# Altium PCB Temctrl.PcbDoc (part 1 of 2)
Units mm, origin at the board's own origin, x right, y up, seen from the top; angles counter-clockwise.
Board outline 209.42 x 71.25 mm, 2 copper layers (Top Layer, Bottom Layer); 243 components, 190 nets, 729 pads, 123 vias.
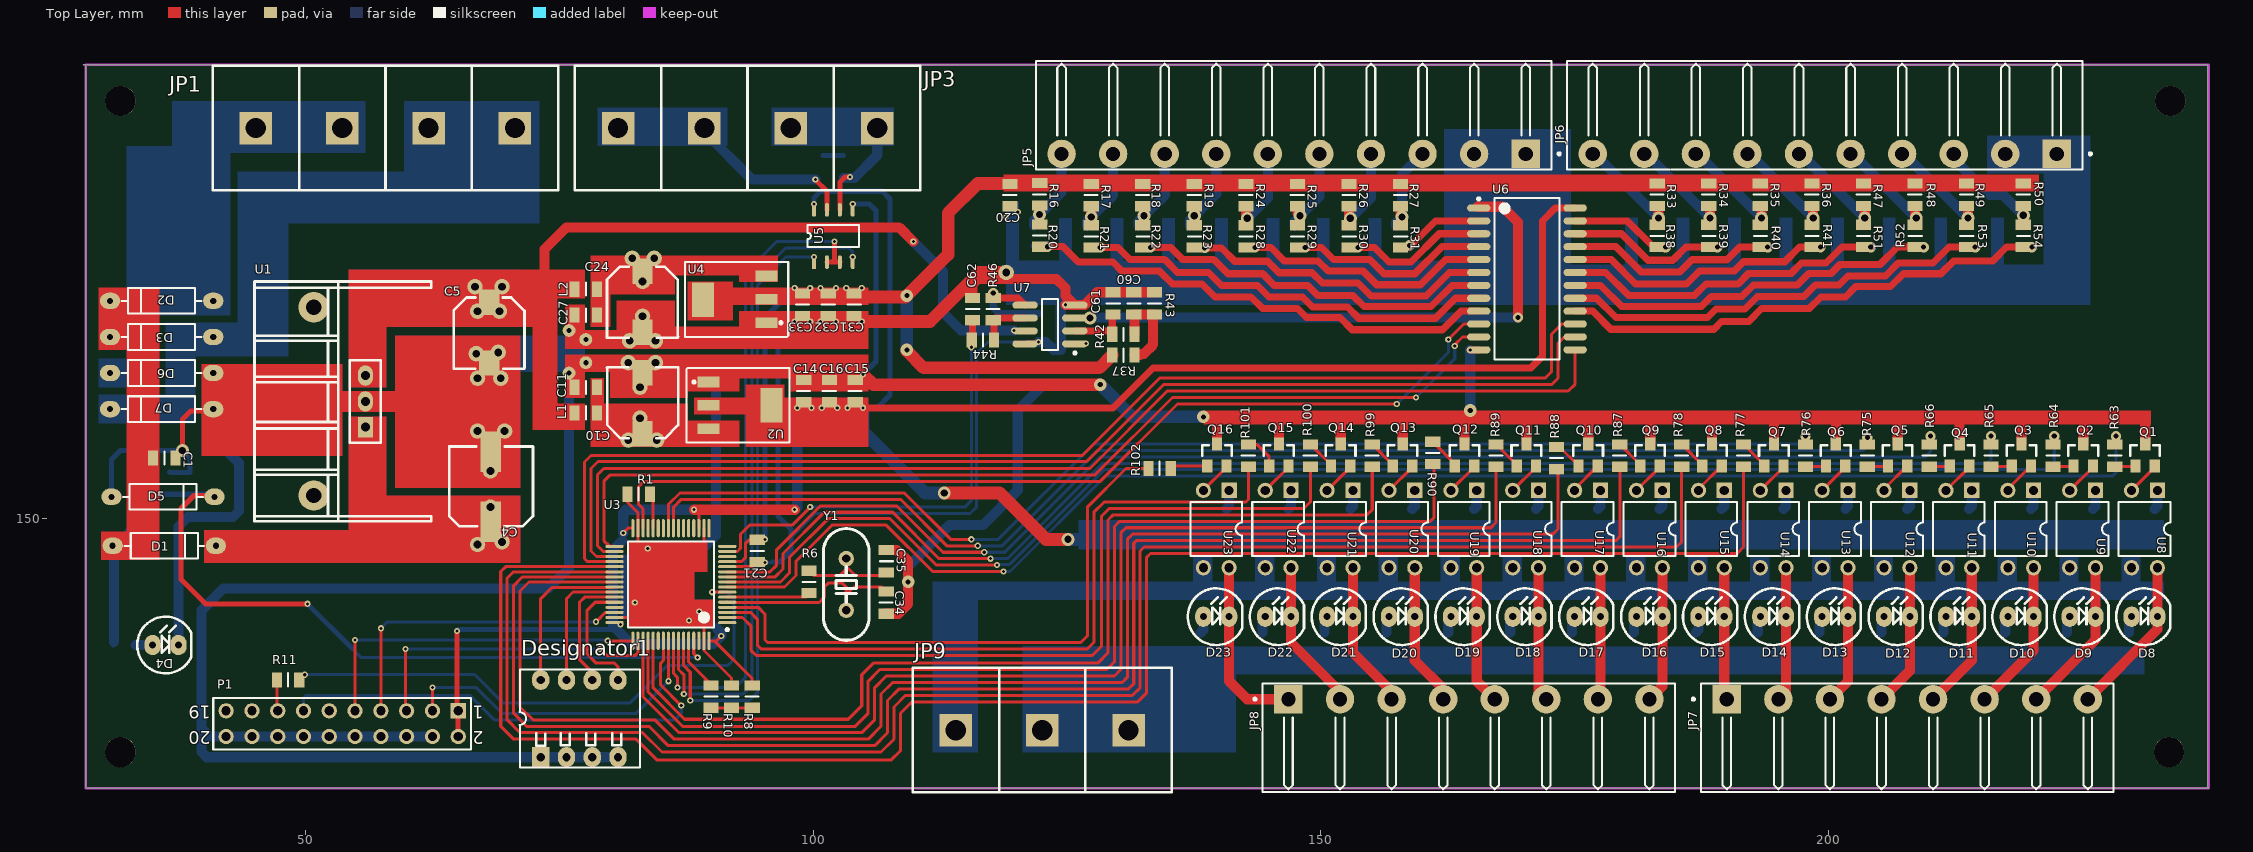
[diagram p0: Top Layer view]
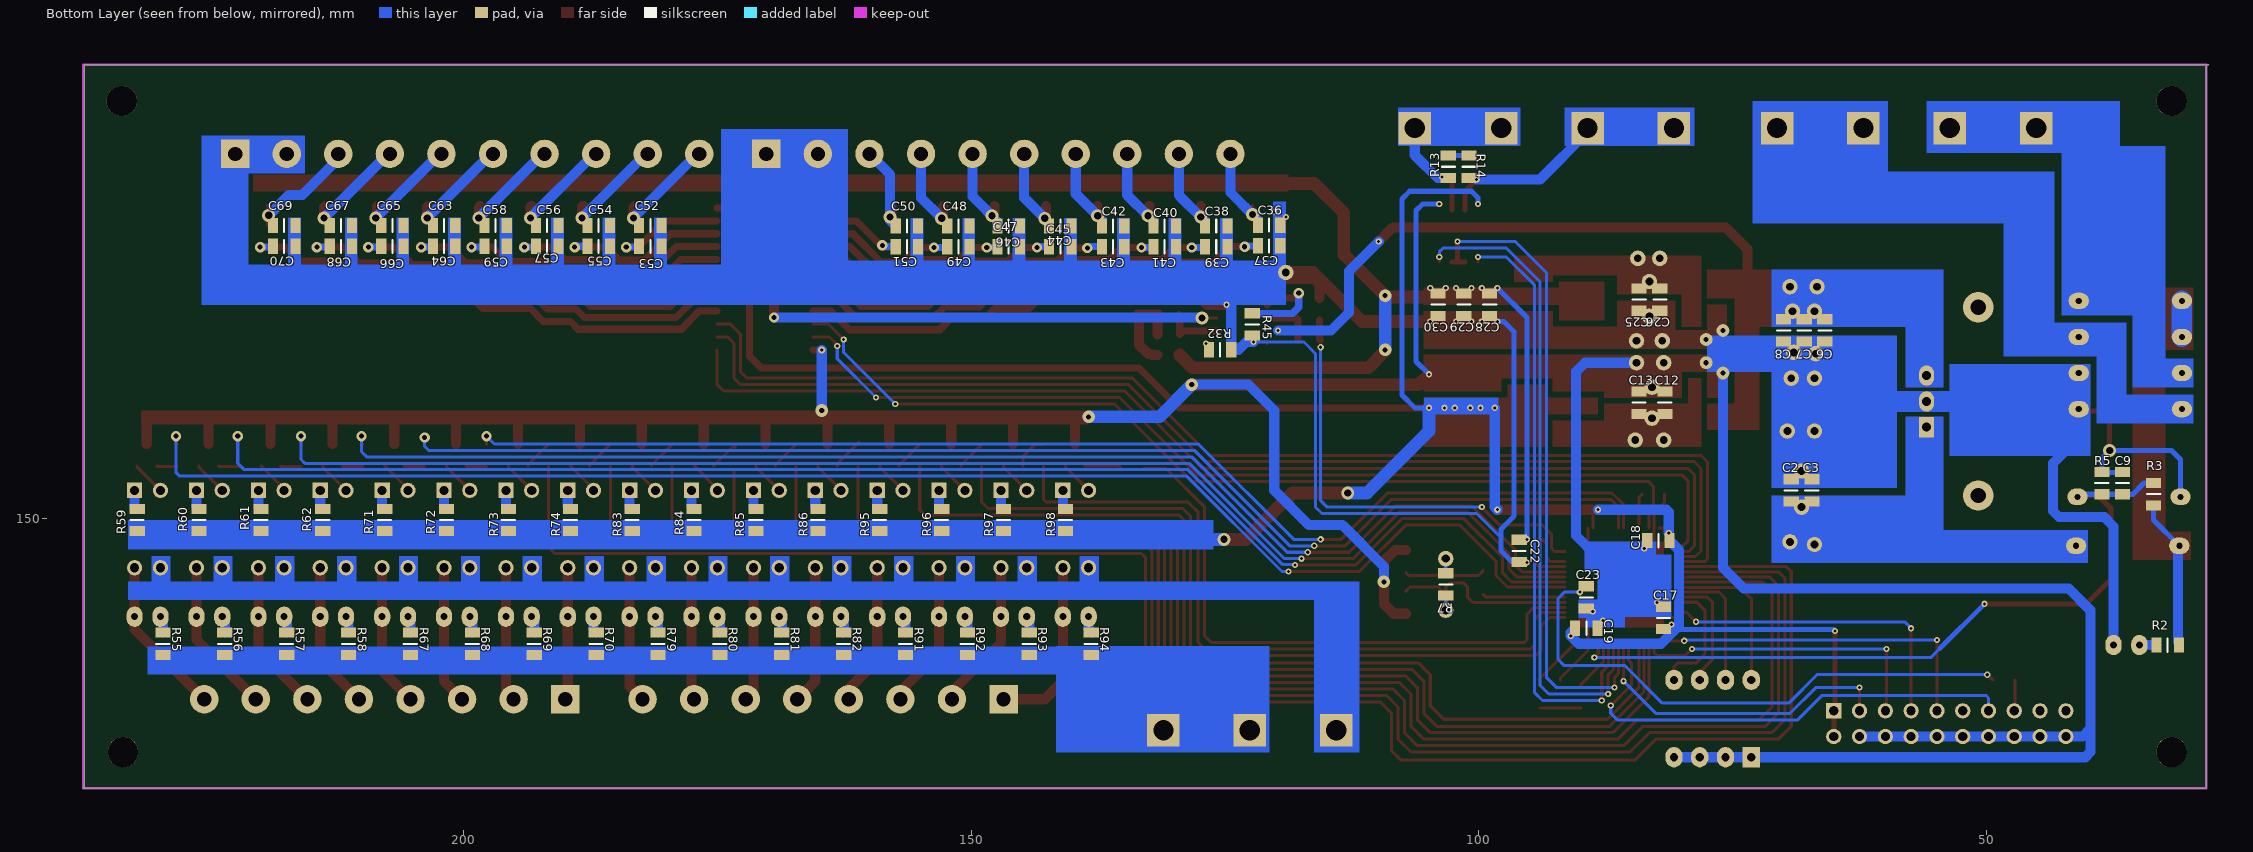
[diagram p1: Bottom Layer view, seen from below]

## Layer stack, top to bottom
Top Layer: signal copper 0.0356
Dielectric: dielectric 0.32, FR-4, Dk 4.8
Bottom Layer: signal copper 0.0356

## Board outline
28.321,194.691 28.321,123.444 237.49,123.444 237.363,123.571 237.363,194.691 28.067,194.691 28.321,194.691

## Design rules (kind name [scope] priority, off if disabled: settings)
Clearance [All] p1: gap=0.152
HoleSize [All] p1: absolutevalues=TRUE maxlimit=25.4 minlimit=0.025 maxpercent=80.000 minpercent=20.000
HoleToHoleClearance [All] p1: gap=0 allowstackedmicrovias=TRUE
MinimumSolderMaskSliver [All] p1: minsoldermaskwidth=0
PolygonConnect [All] p1: connectstyle=Relief reliefconductorwidth=0.254 reliefentries=4 polygonreliefangle="90 Angle"
RoutingVias [All] p1: holewidth=0.508 width=1.016 viastyle="Through Hole" minholewidth=0.305 minwidth=0.61 maxholewidth=3.81 maxwidth=5.08
SilkToSilkClearance [All] p1: silktosilkclearance=0
SilkscreenOverComponentPads [All] p1: minsilkscreentomaskgap=0
SolderMaskExpansion [All] p1: expansion=0.102
TestPointUsage [All] p1: valid=0 allowmultiple=FALSE
Testpoint [All] p1: side=15 testpointundercomponent=TRUE minsize=1.016 maxsize=2.54 preferedsize=1.524 minholesize=0 maxholesize=1.016 preferedholesize=0.813 testpointgrid=0.025 style=1023 order=0123456789
Width [All] p1: maxlimit=25.4 minlimit=0.254 preferedwidth=1.016
19 further rules are at their usual default settings.

## Classes and differential pairs
component class Temctrl_CPU: C1 C2 C3 C4 C5 C6 C7 C8 C9 C10 C11 C12 C13 C14 C15 C16 C17 C18 C19 C20 C21 C22 C23 C24 C25 C26 C27 C28 C29 C30 C31 C32 C33 C34 C35 D1 D2 D3 D4 D5 D6 D7 JP1 JP3 L1 L2 P1 R1 R2 R3 R5 R6 R7 R8 R9 R10 R11 R13 R14 U1 U2 U3 U4 U5 Y1
component class Temctrl_I: C36 C37 C38 C39 C40 C41 C42 C43 C44 C45 C46 C47 C48 C49 C50 C51 C52 C53 C54 C55 C56 C57 C58 C59 C60 C61 C62 C63 C64 C65 C66 C67 C68 C69 C70 JP5 JP6 R16 R17 R18 R19 R20 R21 R22 R23 R24 R25 R26 R27 R28 R29 R30 R31 R32 R33 R34 R35 R36 R37 R38 R39 R40 R41 R42 R43 R44 R45 R46 R47 R48 R49 R50 R51 R52 R53 R54 U6 U7
component class Temctrl_O: D8 D9 D10 D11 D12 D13 D14 D15 D16 D17 D18 D19 D20 D21 D22 D23 JP7 JP8 JP9 Q1 Q2 Q3 Q4 Q5 Q6 Q7 Q8 Q9 Q10 Q11 Q12 Q13 Q14 Q15 Q16 R55 R56 R57 R58 R59 R60 R61 R62 R63 R64 R65 R66 R67 R68 R69 R70 R71 R72 R73 R74 R75 R76 R77 R78 R79 R80 R81 R82 R83 R84 R85 R86 R87 R88 R89 R90 R91 R92 R93 R94 R95 R96 R97 R98 R99 R100 R101 R102 U8 U9 U10 U11 U12 U13 U14 U15 U16 U17 U18 U19 U20 U21 U22 U23

## Components (designator, comment, footprint, x,y, rotation, side; value= is the part's Value field where it differs from the comment)
C1 "106" 0805 36.068,155.956 r0 top
C2 "104" 0805 69.215,152.781 r90 bottom
C3 "104" 0805 67.183,152.781 r90 bottom
C4 "50V/100uF" "50V/100uF SOC" 68.199,149.733 r90 top
C5 "16V/100uF" "100/16V   SOC" 68.072,171.323 r270 top
C6 "104" 0805 65.913,168.529 r270 bottom
C7 "104" 0805 67.945,168.529 r270 bottom
C8 "104" 0805 69.977,168.529 r270 bottom
C9 "104" 0805 36.576,153.5 r90 bottom
C10 "100uF/16V" "100/16V   SOC" 83.185,158.369 r90 top
C11 "104" 0805 77.597,162.941 r180 top
C12 "104" 0805 81.661,161.417 r90 bottom
C13 "104" 0805 84.201,161.417 r90 bottom
C14 "106" 0805 99.06,162.56 r90 top
C15 "106" 0805 104.14,162.56 r90 top
C16 "104" 0805 101.6,162.56 r90 top
C17 "104" 0805 81.788,140.208 r90 bottom
C18 "104" 0805 82.296,147.828 r0 bottom
C19 "104" 0805 89.408,139.192 r180 bottom
C20 "104" 0805 119.38,181.864 r90 top
C21 "104" 0805 94.488,146.812 r90 top
C22 "106" 0805 96.012,146.812 r90 bottom
C23 "104" 0805 89.408,142.24 r270 bottom
C24 "100uF/16V" "100/16V   SOC" 83.185,174.371 r270 top
C25 "104" 0805 84.201,171.577 r270 bottom
C26 "104" 0805 82.169,171.577 r270 bottom
C27 "104" 0805 77.597,170.053 r180 top
C28 "106" 0805 98.933,171.069 r270 bottom
C29 "106" 0805 101.473,171.069 r270 bottom
C30 "104" 0805 104.013,171.069 r270 bottom
C31 "104" 0805 104.013,171.069 r270 top
C32 "104" 0805 101.473,171.069 r270 top
C33 "104" 0805 98.933,171.069 r270 top
C34 "20P" 0805 107.188,141.732 r90 top
C35 "20P" 0805 107.188,145.796 r270 top
C36 "104" 0805 120.65,178.9 r180 bottom
C37 "102" 0805 120.65,176.868 r0 bottom
C38 "104" 0805 125.857,178.816 r180 bottom
C39 "102" 0805 125.857,176.784 r0 bottom
C40 "104" 0805 130.937,178.816 r180 bottom
C41 "102" 0805 130.937,176.784 r0 bottom
C42 "104" 0805 136.017,178.816 r180 bottom
C43 "102" 0805 136.017,176.784 r0 bottom
C44 "104" 0805 141.224,178.816 r180 bottom
C45 "102" 0805 141.224,176.784 r0 bottom
C46 "104" 0805 146.304,178.816 r180 bottom
C47 "102" 0805 146.304,176.784 r0 bottom
C48 "104" 0805 151.257,178.816 r180 bottom
C49 "102" 0805 151.257,176.784 r0 bottom
C50 "104" 0805 156.337,178.816 r180 bottom
C51 "102" 0805 156.337,176.784 r0 bottom
C52 "104" 0805 181.61,178.859 r180 bottom
C53 "102" 0805 181.61,176.827 r0 bottom
C54 "104" 0805 186.69,178.859 r180 bottom
C55 "102" 0805 186.69,176.827 r0 bottom
C56 "104" 0805 191.77,178.859 r180 bottom
C57 "102" 0805 191.77,176.827 r0 bottom
C58 "104" 0805 196.85,178.859 r180 bottom
C59 "102" 0805 196.85,176.827 r0 bottom
C60 "104" 0805 131.572,171.196 r270 top
C61 "102" 0805 129.54,171.196 r270 top
C62 "102" 0805 115.697,170.645 r270 top
C63 "104" 0805 201.93,178.859 r180 bottom
C64 "102" 0805 201.93,176.827 r0 bottom
C65 "104" 0805 207.01,178.859 r180 bottom
C66 "102" 0805 207.01,176.827 r0 bottom
C67 "104" 0805 212.09,178.859 r180 bottom
C68 "102" 0805 212.09,176.827 r0 bottom
C69 "104" 0805 217.678,178.859 r180 bottom
C70 "102" 0805 217.678,176.827 r0 bottom
D1 "4007" DIODE0.4 36.068,147.32 r0 top
D2 "4007" DIODE0.4 35.814,171.45 r180 top
D3 "4007" DIODE0.4 35.814,167.894 r180 top
D4 "LED0" LED0.1-0.22 36.195,137.541 r0 top
D5 "1N5333B" DIODE0.4 35.941,152.146 r0 top
D6 "4007" DIODE0.4 35.814,164.338 r180 top
D7 "4007" DIODE0.4 35.814,160.782 r180 top
D8 "LED0" LED0.1-0.22 231.14,140.335 r0 top
D9 "LED0" LED0.1-0.22 225.044,140.335 r0 top
D10 "LED0" LED0.1-0.22 218.948,140.335 r0 top
D11 "LED0" LED0.1-0.22 212.852,140.335 r0 top
D12 "LED0" LED0.1-0.22 206.756,140.335 r0 top
D13 "LED0" LED0.1-0.22 200.66,140.335 r0 top
D14 "LED0" LED0.1-0.22 194.564,140.335 r0 top
D15 "LED0" LED0.1-0.22 188.468,140.335 r0 top
D16 "LED0" LED0.1-0.22 182.372,140.335 r0 top
D17 "LED0" LED0.1-0.22 176.276,140.335 r0 top
D18 "LED0" LED0.1-0.22 170.18,140.335 r0 top
D19 "LED0" LED0.1-0.22 164.084,140.335 r0 top
D20 "LED0" LED0.1-0.22 157.988,140.335 r0 top
D21 "LED0" LED0.1-0.22 151.892,140.335 r0 top
D22 "LED0" LED0.1-0.22 145.796,140.335 r0 top
D23 "LED0" LED0.1-0.22 139.7,140.335 r0 top
Designator1 "Comment" SW-DIP-4 73.152,130.302 r0 top
JP1 "H-4" P4 70.612,188.468 r180 top
JP3 "H-4" P4 80.772,188.468 r0 top
JP5 "Header 10" "HEAD10B-H - X" 170.18,185.928 r270 top
JP6 "Header 10" "HEAD10B-H - X" 222.504,185.928 r270 top
JP7 "Header 8" "HEAD8B-H - X" 189.992,132.207 r90 top
JP8 "Header 8" "HEAD8B-H - X" 146.812,132.207 r90 top
JP9 "H-3" P3 131.064,129.159 r180 top
L1 "Inductor" 0805 77.597,160.401 r0 top
L2 "Inductor" 0805 77.597,172.593 r0 top
P1 "JTAG" HDR2X10 65.024,131.064 r180 top
Q1 "NPN" S9013SMD 230.251,155.194 r0 top
Q2 "NPN" S9013SMD 224.155,155.194 r0 top
Q3 "NPN" S9013SMD 218.059,155.194 r0 top
Q4 "NPN" S9013SMD 211.963,155.194 r0 top
Q5 "NPN" S9013SMD 205.867,155.194 r0 top
Q6 "NPN" S9013SMD 199.771,155.194 r0 top
Q7 "NPN" S9013SMD 193.675,155.194 r0 top
Q8 "NPN" S9013SMD 187.579,155.194 r0 top
Q9 "NPN" S9013SMD 181.483,155.194 r0 top
Q10 "NPN" S9013SMD 175.387,155.194 r0 top
Q11 "NPN" S9013SMD 169.291,155.194 r0 top
Q12 "NPN" S9013SMD 163.195,155.194 r0 top
Q13 "NPN" S9013SMD 157.099,155.194 r0 top
Q14 "NPN" S9013SMD 151.003,155.194 r0 top
Q15 "NPN" S9013SMD 144.907,155.194 r0 top
Q16 "NPN" S9013SMD 138.811,155.194 r0 top
R1 "10K" 0805 82.804,152.4 r0 top
R2 "10K" 0805 32.131,137.541 r0 bottom
R3 "100K" 0805 33.528,152.4 r270 bottom
R5 "20K" 0805 38.608,153.5 r90 bottom
R6 "390R" 0805 99.568,143.764 r270 top
R7 "1M" 0805 103.251,143.51 r270 bottom
R8 "NC" 0805 93.98,132.461 r90 top
R9 "10K" 0805 89.916,132.461 r270 top
R10 "10K" 0805 91.948,132.461 r270 top
R11 "0" 0805 48.26,134.112 r0 top
R13 "62" 0805 102.997,184.658 r270 bottom
R14 "62" 0805 100.965,184.658 r270 bottom
R16 "3K3 0.1%" 0805 122.301,181.948 r90 top
R17 "3K3 0.1%" 0805 127.381,181.864 r90 top
R18 "3K3 0.1%" 0805 132.461,181.864 r90 top
R19 "3K3 0.1%" 0805 137.541,181.864 r90 top
R20 "100K" 0805 122.301,177.884 r270 top
R21 "100K" 0805 127.381,177.8 r270 top
R22 "100K" 0805 132.461,177.8 r270 top
R23 "100K" 0805 137.541,177.8 r270 top
R24 "3K3 0.1%" 0805 142.621,181.864 r90 top
R25 "3K3 0.1%" 0805 147.701,181.864 r90 top
R26 "3K3 0.1%" 0805 152.781,181.864 r90 top
R27 "3K3 0.1%" 0805 157.861,181.864 r90 top
R28 "100K" 0805 142.621,177.8 r270 top
R29 "100K" 0805 147.701,177.8 r270 top
R30 "100K" 0805 152.781,177.8 r270 top
R31 "100K" 0805 157.861,177.8 r270 top
R32 "10K" 0805 125.476,166.624 r180 bottom
R33 "3K3 0.1%" 0805 183.134,181.907 r90 top
R34 "3K3 0.1%" 0805 188.214,181.907 r90 top
R35 "3K3 0.1%" 0805 193.294,181.907 r90 top
R36 "3K3 0.1%" 0805 198.374,181.907 r90 top
R37 "3K3 0.1%" 0805 130.556,166.116 r180 top
R38 "100K" 0805 183.134,177.843 r270 top
R39 "100K" 0805 188.214,177.843 r270 top
R40 "100K" 0805 193.294,177.843 r270 top
R41 "100K" 0805 198.374,177.843 r270 top
R42 "100K" 0805 130.556,168.148 r180 top
R43 "100 0.1%" 0805 133.604,171.196 r270 top
R44 "1K" 0805 116.713,167.597 r180 top
R45 "3K3 0.1%" 0805 122.301,169.121 r90 bottom
R46 "115K 0.1%" 0805 117.729,170.645 r90 top
R47 "3K3 0.1%" 0805 203.454,181.907 r90 top
R48 "3K3 0.1%" 0805 208.534,181.907 r90 top
R49 "3K3 0.1%" 0805 213.614,181.907 r90 top
R50 "3K3 0.1%" 0805 219.202,181.907 r90 top
R51 "100K" 0805 203.454,177.843 r270 top
R52 "100K" 0805 208.534,177.843 r270 top
R53 "100K" 0805 213.614,177.843 r270 top
R54 "100K" 0805 219.202,177.843 r270 top
R55 "10K" 0805 229.616,137.668 r90 bottom
R56 "10K" 0805 223.52,137.668 r90 bottom
R57 "10K" 0805 217.424,137.668 r90 bottom
R58 "10K" 0805 211.328,137.668 r90 bottom
R59 "470" 0805 232.156,149.86 r90 bottom
R60 "470" 0805 226.06,149.86 r90 bottom
R61 "470" 0805 219.964,149.86 r90 bottom
R62 "470" 0805 213.868,149.86 r90 bottom
R63 "3K3" 0805 228.219,156.21 r270 top
R64 "3K3" 0805 222.123,156.21 r270 top
R65 "3K3" 0805 216.027,156.21 r270 top
R66 "3K3" 0805 209.931,156.21 r270 top
R67 "10K" 0805 205.232,137.668 r90 bottom
R68 "10K" 0805 199.136,137.668 r90 bottom
R69 "10K" 0805 193.04,137.668 r90 bottom
R70 "10K" 0805 186.944,137.668 r90 bottom
R71 "470" 0805 207.772,149.86 r90 bottom
R72 "470" 0805 201.676,149.86 r90 bottom
R73 "470" 0805 195.58,149.86 r90 bottom
R74 "470" 0805 189.484,149.86 r90 bottom
R75 "3K3" 0805 203.835,156.21 r270 top
R76 "3K3" 0805 197.739,156.21 r270 top
R77 "3K3" 0805 191.643,156.21 r90 top
R78 "3K3" 0805 185.547,156.21 r90 top
R79 "10K" 0805 180.848,137.668 r90 bottom
R80 "10K" 0805 174.752,137.668 r90 bottom
R81 "10K" 0805 168.656,137.668 r90 bottom
R82 "10K" 0805 162.56,137.668 r90 bottom
R83 "470" 0805 183.388,149.86 r90 bottom
R84 "470" 0805 177.292,149.86 r90 bottom
R85 "470" 0805 171.196,149.86 r90 bottom
R86 "470" 0805 165.1,149.86 r90 bottom
R87 "3K3" 0805 179.451,156.21 r90 top
R88 "3K3" 0805 173.228,155.956 r90 top
R89 "3K3" 0805 167.259,156.21 r90 top
R90 "3K3" 0805 161.036,156.464 r90 top
R91 "10K" 0805 156.464,137.668 r90 bottom
R92 "10K" 0805 150.368,137.668 r90 bottom
R93 "10K" 0805 144.272,137.668 r90 bottom
R94 "10K" 0805 138.176,137.668 r90 bottom
R95 "470" 0805 159.004,149.86 r90 bottom
R96 "470" 0805 152.908,149.86 r90 bottom
R97 "470" 0805 146.812,149.86 r90 bottom
R98 "470" 0805 140.716,149.86 r90 bottom
R99 "3K3" 0805 155.067,156.21 r90 top
R100 "3K3" 0805 148.971,156.21 r90 top
R101 "3K3" 0805 142.875,156.21 r90 top
R102 "3K3" 0805 134.112,154.94 r0 top
U1 "7805" "SIP-W3 /SRQ25" 55.88,161.544 r90 top
U2 "LM1117" DSO-G3/P2.3 89.662,163.449 r270 top
U3 "STM32F103R8T6" LQFP64_N 85.979,143.51 r180 top
U4 "LM1117" DSO-G3/P2.3 95.377,169.291 r90 top
U5 "MAX485CPA" SOP8-max485 100.076,175.26 r90 top
U6 "MC14067BDW" 751E-04_M 170.307,173.609 r0 top
U7 "EL8170" 751-06_M 123.317,169.121 r180 top
U8 "PC817" DIP-4 231.14,148.971 r180 top
U9 "PC817" DIP-4 225.044,148.971 r180 top
U10 "PC817" DIP-4 218.948,148.971 r180 top
U11 "PC817" DIP-4 212.852,148.971 r180 top
U12 "PC817" DIP-4 206.756,148.971 r180 top
U13 "PC817" DIP-4 200.66,148.971 r180 top
U14 "PC817" DIP-4 194.564,148.971 r180 top
U15 "PC817" DIP-4 188.468,148.971 r180 top
U16 "PC817" DIP-4 182.372,148.971 r180 top
U17 "PC817" DIP-4 176.276,148.971 r180 top
U18 "PC817" DIP-4 170.18,148.971 r180 top
U19 "PC817" DIP-4 164.084,148.971 r180 top
U20 "PC817" DIP-4 157.988,148.971 r180 top
U21 "PC817" DIP-4 151.892,148.971 r180 top
U22 "PC817" DIP-4 145.796,148.971 r180 top
U23 "PC817" DIP-4 139.7,148.971 r180 top
Y1 "XTAL" XTL 103.251,146.05 r270 top

## Footprints (in the part's own frame and the unit in brackets; to place one, negate y for a bottom-side part, rotate by r counter-clockwise, add the part's x,y. Pads: shape width x height; smd on the part's side, far side on the other; paste and mask are expansions set on the pad)
"50V/100uF SOC" [mm]
  rect 4x2 smd: 1(-0.051,-0.025) 2(6.838,-0.025)
  silkscreen extent -0.51,-4.19 7.37,4.06
"100/16V   SOC" [mm]
  rect 2.5x2 smd: 1(0,0) 2(6,0)
  silkscreen extent -0.46,-3.51 6.54,3.5
751-06_M [mm] "8-Pin Small Outline Integrated Circuit 1.27 mm Pitch, IPC Low Density"
  oval 2.5x0.7 smd: 1(-2.45,1.905) 2(-2.45,0.635) 3(-2.45,-0.635) 4(-2.45,-1.905) 5(2.45,-1.905) 6(2.45,-0.635) 7(2.45,0.635) 8(2.45,1.905)
  silkscreen extent -2.58,-2.5 0.8,2.93, body extent -2,-2.5 2,2.5, height 1.75
751E-04_M [mm] "24-Pin Small Outline Integrated Circuit 1.27 mm Pitch, IPC Low Density"
  oval 2.3x0.7 smd: 1(-4.75,6.985) 2(-4.75,5.715) 3(-4.75,4.445) 4(-4.75,3.175) 5(-4.75,1.905) 6(-4.75,0.635) 7(-4.75,-0.635) 8(-4.75,-1.905) 9(-4.75,-3.175) 10(-4.75,-4.445) 11(-4.75,-5.715) 12(-4.75,-6.985) 13(4.75,-6.985) 14(4.75,-5.715) 15(4.75,-4.445) 16(4.75,-3.175) 17(4.75,-1.905) 18(4.75,-0.635) 19(4.75,0.635) 20(4.75,1.905) 21(4.75,3.175) 22(4.75,4.445) 23(4.75,5.715) 24(4.75,6.985)
  silkscreen extent -4.87,-7.95 3.2,8.01, body extent -3.8,-7.93 3.8,7.93, height 2.65
0805 [mm]
  rect 1x1.5 smd: 1(-1.1,0) 2(1.1,0)
  silkscreen extent 0,-0.64 0,0.67
DIODE0.4 [mm]
  oval 2x1.6 hole 0.6: 1(-5.08,0) 2(5.08,0)
  silkscreen extent -3.94,-1.27 3.94,1.27
DIP-4 [mm] "DIP; 4 Leads; Row Spacing 7.62 mm; Pitch 2.54 mm"
  rect 1.5x1.5 hole 0.9: 1(-1.27,-3.81)
  round 1.5 hole 0.9: 2(1.27,-3.81) 3(1.27,3.81) 4(-1.27,3.81)
  silkscreen extent -2.55,-2.65 2.55,2.65
DSO-G3/P2.3 [mm]
  rect 1.05x2.159 smd: 1(4.6,0) 2(0,0) 3(2.3,0)
  rect 3.4x2.159 smd: 3(2.286,6.223)
  silkscreen extent -1.4,-2.16 5.97,8
HDR2X10 [mm] "Connector; Header; 10x2 Position"
  rect 1.5x1.5 hole 0.9: 1(0,0)
  round 1.5 hole 0.9: 2(0,2.54) 3(2.54,0) 4(2.54,2.54) 5(5.08,0) 6(5.08,2.54) 7(7.62,0) 8(7.62,2.54) 9(10.16,0) 10(10.16,2.54) 11(12.7,0) 12(12.7,2.54) 13(15.24,0) 14(15.24,2.54) 15(17.78,0) 16(17.78,2.54) 17(20.32,0) 18(20.32,2.54) 19(22.86,0) 20(22.86,2.54)
  silkscreen extent -1.27,-1.27 24.13,3.81
"HEAD8B-H - X" [mm]
  rect 2.8x2.8 hole 1.4: 1(0,0)
  round 2.8 hole 1.4: 2(0,-5.08) 3(0,-10.16) 4(0,-15.24) 5(0,-20.32) 6(0,-25.4) 7(0,-30.48) 8(0,-35.56)
  silkscreen extent -9.14,-38.1 1.52,3.42
"HEAD10B-H - X" [mm]
  rect 2.8x2.8 hole 1.4: 1(0,0)
  round 2.8 hole 1.4: 2(0,-5.08) 3(0,-10.16) 4(0,-15.24) 5(0,-20.32) 6(0,-25.4) 7(0,-30.48) 8(0,-35.56) 9(0,-40.64) 10(0,-45.72)
  silkscreen extent -9.14,-48.26 1.52,3.43
LED0.1-0.22 [mm]
  oval 1.6x2 hole 0.7: 1(-1.27,0) 2(1.27,0)
  silkscreen extent -2.79,-2.79 2.55,2.79
LQFP64_N [mm] "Thin QFP, 64-Leads, Body 10x10mm, Pitch 0.5mm, IPC Medium Density"
  oval 1.8x0.3 smd: 1(-5.55,3.75) 2(-5.55,3.25) 3(-5.55,2.75) 4(-5.55,2.25) 5(-5.55,1.75) 6(-5.55,1.25) 7(-5.55,0.75) 8(-5.55,0.25) 9(-5.55,-0.25) 10(-5.55,-0.75) 11(-5.55,-1.25) 12(-5.55,-1.75) 13(-5.55,-2.25) 14(-5.55,-2.75) 15(-5.55,-3.25) 16(-5.55,-3.75) 33(5.55,-3.75) 34(5.55,-3.25) 35(5.55,-2.75) 36(5.55,-2.25) 37(5.55,-1.75) 38(5.55,-1.25) 39(5.55,-0.75) 40(5.55,-0.25) 41(5.55,0.25) 42(5.55,0.75) 43(5.55,1.25) 44(5.55,1.75) 45(5.55,2.25) 46(5.55,2.75) 47(5.55,3.25) 48(5.55,3.75)
  oval 0.3x1.8 smd: 17(-3.75,-5.55) 18(-3.25,-5.55) 19(-2.75,-5.55) 20(-2.25,-5.55) 21(-1.75,-5.55) 22(-1.25,-5.55) 23(-0.75,-5.55) 24(-0.25,-5.55) 25(0.25,-5.55) 26(0.75,-5.55) 27(1.25,-5.55) 28(1.75,-5.55) 29(2.25,-5.55) 30(2.75,-5.55) 31(3.25,-5.55) 32(3.75,-5.55) 49(3.75,5.55) 50(3.25,5.55) 51(2.75,5.55) 52(2.25,5.55) 53(1.75,5.55) 54(1.25,5.55) 55(0.75,5.55) 56(0.25,5.55) 57(-0.25,5.55) 58(-0.75,5.55) 59(-1.25,5.55) 60(-1.75,5.55) 61(-2.25,5.55) 62(-2.75,5.55) 63(-3.25,5.55) 64(-3.75,5.55)
  silkscreen extent -5.68,-4.25 4.25,4.57, body extent -5,-5 5,5, height 1.6
P3 [mm]
  rect 3.2x3.2 hole 2: 1(0,0) 2(8.509,0) 3(17.018,0)
  silkscreen extent -4.25,-6.13 21.25,6.13
P4 [mm]
  rect 3.2x3.2 hole 2: 1(0,0) 2(8.509,0) 3(17.018,0) 4(25.527,0)
  silkscreen extent -4.25,-6.13 29.76,6.13
S9013SMD [mil]
  rect 40x50 smd: 1(74.98,-0.16) 2(-0.02,-0.16) 3(37.98,84.84)
  silkscreen extent -20,40 95,80
"SIP-W3 /SRQ25" [mm]
  round 3 hole 1.5: 0(-9.271,5.08) 0(9.271,5.08)
  rect 2x1.5 hole 0.9: 1(-2.54,0)
  oval 2x1.5 hole 0.9: 2(0,0) 3(2.54,0)
  silkscreen extent -11.81,-6.48 11.81,10.92
SOP8-max485 [mm]
  rect 1.35x0.4 smd: 1(0,0)
  oval 1.35x0.4 smd: 2(0,-1.27) 3(0,-2.54) 4(0,-3.81) 5(5.15,-3.81) 6(5.15,-2.54) 7(5.15,-1.27) 8(5.15,0)
  silkscreen extent 1.51,-4.44 3.64,0.64
SW-DIP-4 [mm]
  rect 1.7x2 hole 0.8: 1(0,-3.81)
  oval 1.7x2 hole 0.8: 2(2.54,-3.81) 3(5.08,-3.81) 4(7.62,-3.81) 5(7.62,3.81) 6(5.08,3.81) 7(2.54,3.81) 8(0,3.81)
  silkscreen extent -2.08,-4.83 9.78,4.83
XTL [mil]
  round 60 hole 31.5: 1(0,0) 2(200,0)
  silkscreen extent -116,-89 316,89

## Part data
C1 C2 C3 C6 C7 C8 C9: library part "Cap Pol2", "Polarized Capacitor (Axial)"
C4 C5 C10 C24: library part "Cap Pol1", "Polarized Capacitor (Radial)"
C11 C12 C13 C14 C15 C16 C17 C18 C19 C25 C26 C27 C28 C29 C30 C31 C32 C33: library part Cap, "Capacitor"
C20 C21 C22 C23 C34 C35: library part "Cap Semi", "Capacitor (Semiconductor SIM Model)"
C36 C37 C38 C39 C40 C41 C42 C43 C44 C45 C46 C47 C48 C49 C50 C51 C52 C53 C54 C55 C56 C57 C58 C59 C60 C61 C62 C63 C64 C65 C66 C67 C68 C69 C70: library part CAP, "Capacitor"
D1 D2 D3 D6 D7: library part Diode, "Default Diode"
D4 D8 D9 D10 D11 D12 D13 D14 D15 D16 D17 D18 D19 D20 D21 D22 D23: "Typical INFRARED GaAs LED"
D5: library part "D Zener", "Zener Diode"
JP1 JP3: "Header, 4-Pin"
JP5 JP6: "Header, 10-Pin"
JP7 JP8: "Header, 8-Pin"
JP9: "Header, 3-Pin"
P1: library part "Header 10X2", "Header, 10-Pin, Dual row"
Q1 Q2 Q3 Q4 Q5 Q6 Q7 Q8 Q9 Q10 Q11 Q12 Q13 Q14 Q15 Q16: "NPN Bipolar Transistor"
R1 R6 R7 R8 R9 R10 R11: library part Res3, "Resistor"
R2 R3 R5 R13 R14 R16 R17 R18 R19 R20 R21 R22 R23 R24 R25 R26 R27 R28 R29 R30 R31 R32 R33 R34 R35 R36 R37 R38 R39 R40 R41 R42 R43 R44 R45 R46 R47 R48 R49 R50 R51 R52 R53 R54 R55 R56 R57 R58 R59 R60 R61 R62 R63 R64 R65 R66 R67 R68 R69 R70 R71 R72 R73 R74 R75 R76 R77 R78 R79 R80 R81 R82 R83 R84 R85 R86 R87 R88 R89 R90 R91 R92 R93 R94 R95 R96 R97 R98 R99 R100 R101 R102: library part Res, "Resistor"
U1: library part 78*05
U3: "STM32 ARM-based 32-bit MCU with 64 Kbytes Flash, 64-pin LQFP, Industrial Temperature"
U5: "Low-Power, Slew-Rate-Limited RS-485/RS-422 Transceiver"
U6: library part MC14067
U8 U9 U10 U11 U12 U13 U14 U15 U16 U17 U18 U19 U20 U21 U22 U23: library part Optoisolator1, "4-Pin Phototransistor Optocoupler"
Y1: "Crystal Oscillator"

## Free pads (board coordinates)
  round 3 hole 3: 0(31.75,191.135) 1(31.75,127) 2(233.553,127) 3(233.68,191.135)
  round 1.524 hole 0.762: 0(66.675,172.847) 1(69.342,172.847) 2(66.929,170.434) 3(69.088,170.434) 4(66.802,166.243) 5(68.961,166.37) 6(66.929,163.83) 7(69.215,163.83) 8(66.929,158.623) 9(69.596,158.623) 10(68.199,154.686) 11(68.199,151.13) 12(66.929,147.447) 13(69.342,147.701) 14(82.169,175.641) 15(84.328,175.641) 16(83.185,173.355) 17(83.185,169.926) 18(84.455,167.513) 19(81.915,167.513) 20(82.931,162.941) 21(82.931,159.893) 22(81.788,157.734) 23(84.582,157.734) 24(81.788,165.354) 25(84.455,165.354) 27(118.999,174.244)
  round 1.27 hole 0.508: 26(75.946,164.338) 26(75.946,168.529) 26(77.597,165.354) 26(77.597,167.64)

## Via types
v1: diameter 0.61, hole 0.305, Top Layer to Bottom Layer, 72 vias
v2: diameter 1.27, hole 0.711, Top Layer to Bottom Layer, 20 vias
v3: diameter 1.016, hole 0.508, Top Layer to Bottom Layer, 17 vias
v4: diameter 1, hole 0.5, Top Layer to Bottom Layer, 7 vias
v5: diameter 1.25, hole 0.5, Top Layer to Bottom Layer, 6 vias
v6: diameter 0.7, hole 0.305, Top Layer to Bottom Layer, 1 vias

## Nets (pads, with @x,y where several pads share a name; then routed paths per layer and width w, separated by ;. In a path a pad name is that pad's centre, name@x,y a point inside that pad or via, vN(x,y) a via of type N, cw(c..) or ccw(c..) an arc to the next point about the centre after c; other vN are vias at no path point)
+5V: C5.1 C6.1 C7.1 C8.1 L1.1 L2.1 pad.0@66.675,172.847 pad.1@69.342,172.847 pad.2@66.929,170.434 pad.3@69.088,170.434 U1.3 U7.7 | length 61.6
  Top Layer w1: pad.1@69.342,172.847 73.533,172.847 73.533,176.53 75.692,178.689 108.458,178.689 v1(109.855,177.292)
  Bottom Layer w1: v1(109.855,177.292) 112.776,174.371 112.776,170.307 114.554,168.529 v1(119.761,168.529)
+VIN: C1.1 D1.1 D2.2 D3.2 R2.1 R3.2 | length 31.3
  Top Layer w2: D3.2@30.734,167.894 D2.2@30.734,171.45
  Bottom Layer w0.5: R2.1@31.031,137.541 31.031,147.277 D1.1@30.988,147.32 33.528,149.86 R3.2@33.528,151.3
  Bottom Layer w1: R2.1@31.115,137.838 D1.1@31.115,147.193
  Bottom Layer w2: D3.2@30.734,167.894 D2.2@30.734,171.45
A: JP3.3 JP3.4 R13.2 U5.6 | length 10.8
  Top Layer w0.5: U5.6@102.616,180.41 102.616,183.134 103.124,183.642 v1(103.632,183.642)
  Bottom Layer w1: R13.2@102.997,183.558 104.056,183.558 106.299,185.801 JP3.4@106.299,188.468
AC1: D2.1 D6.2 JP1.3 JP1.4
AC2: D3.1 D7.2 JP1.1 JP1.2 | length 8.5
  Bottom Layer w2: JP1.2@62.103,188.468 JP1.1@70.612,188.468
AGND: C1.2 C2.2 C3.2 C4.2 C5.2 C6.2 C7.2 C8.2 C9.2 C10.2 C11.2 C12.2 C13.2 C14.2 C15.2 C16.2 C17.2 C18.2 C19.2 C20.1 C21.1 C22.1 C23.2 C24.2 C25.2 C26.2 C27.2 C28.2 C29.2 C30.2 C31.2 C32.2 C33.2 C34.1 C35.1 C36.2 C37.1 C38.2 C39.1 C40.2 C41.1 C42.2 C43.1 C44.2 C45.1 C46.2 C47.1 C48.2 C49.1 C50.2 C51.1 C52.2 C53.1 C54.2 C55.1 C56.2 C57.1 C58.2 C59.1 C60.1 C61.1 C62.1 C63.2 C64.1 C65.2 C66.1 C67.2 C68.1 C69.2 C70.1 D4.2 D5.1 D6.1 D7.1 Designator1.1 Designator1.2 Designator1.3 Designator1.4 JP5.1 JP5.2 JP6.1 JP6.2 P1.4 P1.6 P1.8 P1.10 P1.12 P1.14 P1.16 P1.18 P1.20 pad.4 pad.5 pad.6 pad.7 pad.8 pad.9 pad.10 pad.17 pad.18 pad.19 pad.20 pad.24 pad.25 pad.26 pad.27 Q1.3 Q2.3 Q3.3 Q4.3 Q5.3 Q6.3 Q7.3 Q8.3 Q9.3 Q10.3 Q11.3 Q12.3 Q13.3 Q14.3 Q15.3 Q16.3 R1.1 R5.2 R10.1 R32.2 R43.1 R45.1 U1.2 U2.2 U3.12 U3.18 U3.31 U3.47 U3.63 U4.2 U5.5 U6.12 U7.4 U7.8 | length 514.6
  Top Layer w0.3: U3.47@80.429,140.26 82.931,140.26 ; R1.1@81.704,152.4 81.704,151.595 82.729,150.57 U3.31@82.729,149.06 82.729,147.649 ; 89.154,140.26 82.931,140.26 ; 89.229,140.26 U3.63@89.229,137.96 89.229,137.014 91.948,134.295 91.948,134.112 ; U3.18@89.229,149.06 89.229,147.118 89.05,146.939 83.439,146.939 82.729,147.649 ; U3.12@91.529,145.26 94.036,145.26 C21.1@94.488,145.712 ; U7.8@120.867,167.216 120.867,167.228 121.025,167.386 v1(122.174,167.386) ; 82.729,147.649 82.729,140.462 82.931,140.26
  Top Layer w0.5: v2(37.846,156.718) 37.846,159.766 38.672,160.591 40.703,160.591 D7.1@40.894,160.782
  Top Layer w0.7: v6(164.719,166.624) U6.12@165.557,166.624
  Top Layer w1: C34.1@107.188,140.632 108.374,140.632 109.347,141.605 v5(109.347,143.764) 109.347,145.796 108.247,146.896 C35.1@107.188,146.896 ; C62.1@115.697,171.745 115.697,173.101 116.205,173.609 123.952,173.609 124.841,172.72 124.841,171.952 U7.4@125.767,171.026 ; v1(124.841,171.069) 124.884,171.026 U7.4@125.767,171.026 ; R43.1@133.604,172.296 C60.1@131.572,172.296 C61.1@129.54,172.296 127.973,172.296 126.703,171.026 U7.4@125.767,171.026 ; Q16.3@139.776,157.349 139.776,159.817 ; Q15.3@145.872,157.349 145.872,159.69 ; Q14.3@151.968,157.349 151.968,159.563 ; Q13.3@158.064,157.349 158.064,159.588 ; Q12.3@164.16,157.349 164.16,160.096 v5(164.719,160.655) ; Q11.3@170.256,157.349 170.256,160.071 ; Q10.3@176.352,157.349 176.352,159.69 ; Q9.3@182.448,157.349 182.448,159.944 ; Q8.3@188.544,157.349 188.544,159.969 ; Q7.3@194.64,157.349 194.64,159.842 ; Q6.3@200.736,157.349 200.736,159.969 ; Q5.3@206.832,157.349 206.832,159.842 ; Q4.3@212.928,157.349 212.928,159.944 ; Q3.3@219.024,157.349 219.024,159.944 ; Q2.3@225.12,157.349 225.12,159.842 ; Q1.3@231.216,157.349 231.216,159.842
  Top Layer w1.25: 103.632,169.418 v1(104.775,169.418) 111.506,169.418 116.332,174.244 pad.27@118.999,174.244 ; v1(104.902,164.211) 105.918,163.195 v5(128.27,163.195)
  Bottom Layer w0.3: v1(95.25,145.669) C22.1@96.012,145.669 ; 97.79,148.082 100.203,150.495 115.443,150.495 116.078,151.13 116.078,166.243 117.221,167.386 v1(122.174,167.386)
  Bottom Layer w0.5: D5.1@30.861,152.146 30.861,155.829 31.75,156.718 v2(37.846,156.718) 38.608,155.956 R5.2@38.608,154.6 38.608,154.559 36.617,154.559 C9.2@36.576,154.6 ; C22.1@96.012,145.712 96.69,145.712 97.79,146.812 97.79,148.082 97.79,148.971 96.52,150.241 96.52,168.402 97.536,169.418 v1(98.171,169.418) ; v1(103.886,180.975) 105.537,180.975 106.172,180.34 106.172,165.481 v1(104.902,164.211)
  Bottom Layer w1: D4.2@37.465,137.541 37.465,149.225 38.388,150.148 42.833,150.148 43.434,150.749 43.434,155.448 42.418,156.464 42.418,156.845 ; 39.751,127.889 39.751,129.286 ; P1.4@62.484,128.524 P1.6@59.944,128.524 P1.8@57.404,128.524 P1.10@54.864,128.524 P1.12@52.324,128.524 P1.14@49.784,128.524 P1.16@47.244,128.524 P1.18@44.704,128.524 P1.20@42.164,128.524 40.513,128.524 39.751,129.286 ; pad.26@75.946,164.338 75.946,145.161 73.914,143.129 41.91,143.129 39.751,140.97 39.751,129.794 39.751,129.286 ; Designator1.4@80.772,126.492 Designator1.3@78.232,126.492 Designator1.2@75.692,126.492 Designator1.1@73.152,126.492 40.259,126.492 39.751,127 39.751,129.286 ; pad.25@84.455,165.354 89.535,165.354 90.424,164.465 90.424,148.336 88.392,146.304 88.138,146.304 ; v5(109.347,143.764) 109.347,145.288 113.411,149.352 116.713,149.352 120.142,152.781 120.142,160.655 122.682,163.195 v5(128.27,163.195) ; v1(122.174,167.386) 122.936,167.386 123.698,166.624 R32.2@124.376,166.624 124.376,171.915 ; v5(164.719,160.655) v6(164.719,166.624)
  Bottom Layer w1.25: v5(128.27,163.195) 131.445,160.02 v5(138.43,160.02)
  Bottom Layer w2: D7.1@40.894,160.782 D6.1@40.894,164.084
  other v1: 87.757,139.954 88.773,140.843 82.423,141.732 83.693,147.066 99.695,169.418 100.711,169.418 102.235,169.418 118.999,179.705 120.142,180.213
AVCC: C20.2 C21.2 C22.2 C28.1 C29.1 C30.1 C31.1 C32.1 C33.1 R16.2 R17.2 R18.2 R19.2 R24.2 R25.2 R26.2 R27.2 R33.2 R34.2 R35.2 R36.2 R37.2 R47.2 R48.2 R49.2 R50.2 U3.13 U4.3 | length 90.8
  Top Layer w0.3: U3.13@91.529,145.76 92.928,145.76 93.345,146.177 93.345,147.574 93.683,147.912 C21.2@94.488,147.912
  Top Layer w0.5: R16.2@122.301,183.048 R18.2@132.461,183.048 ; R50.2@219.118,183.091 R50.2@219.202,183.007
  Top Layer w1.25: 104.775,171.831 109.093,171.831 113.284,176.022 113.284,180.086 116.205,183.007 120.777,183.007 ; v5(109.22,166.624) 109.22,166.497 110.871,164.846 128.186,164.846 R37.2@129.456,166.116
  Bottom Layer w0.5: v1(95.25,147.955) 95.25,169.799 v1(98.171,172.72)
  Bottom Layer w1.25: v5(109.22,166.624) v5(109.22,171.958)
  other v1: 99.695,172.72 100.711,172.72 102.235,172.72 103.251,172.72 104.775,172.72
B: JP3.1 JP3.2 R14.2 U5.7 | length 25
  Top Layer w0.5: v1(100.203,183.388) 101.346,182.245 U5.7@101.346,180.41
  Bottom Layer w1: JP3.1@80.772,188.468 81.153,188.087 89.281,188.087 93.98,183.388 v1(100.203,183.388)
BOOT0: R9.1 U3.60 | length 5.3
  Top Layer w0.3: U3.60@87.729,137.96 87.729,135.862 88.639,134.953 89.916,133.675 R9.1@89.916,133.561
JNTRST: P1.3 U3.56 | length 32.8
  Top Layer w0.3: P1.3@62.484,131.064 v1(62.484,133.35) ; v1(85.725,133.985) 85.729,133.989 U3.56@85.729,137.96 85.729,137.029
  Bottom Layer w0.3: v1(62.484,133.35) 66.802,133.35 69.342,130.81 82.55,130.81 v1(85.725,133.985)
JTCK: P1.9 U3.49 | length 34.4
  Top Layer w0.3: P1.9@54.864,131.064 v1(54.864,138.049) ; v1(79.756,137.96) U3.49@82.229,137.96
  Bottom Layer w0.3: v1(54.864,138.049) 79.667,138.049 v1(79.756,137.96)
JTDI: P1.5 U3.50 | length 30.6
  Top Layer w0.3: v1(59.817,137.16) 59.817,131.191 P1.5@59.944,131.064 ; v1(78.994,137.16) 79.629,136.525 82.475,136.525 82.729,136.779 U3.50@82.729,137.96
  Bottom Layer w0.3: v1(59.817,137.16) v1(78.994,137.16)
JTDO: P1.13 U3.55 | length 48
  Top Layer w0.3: U3.55@85.229,137.96 85.229,136.029 84.963,135.763 84.963,134.874 84.963,133.604 v1(86.995,131.572)
  Bottom Layer w0.3: P1.13@49.784,131.064 49.784,132.334 50.038,132.588 66.167,132.588 68.58,130.175 86.36,130.175 86.995,130.81 v1(86.995,131.572)
JTMS: P1.7 U3.46 | length 31.8
  Top Layer w0.3: P1.7@57.404,131.064 v1(57.404,139.192) ; v1(78.613,139.834) 79.539,140.76 U3.46@80.429,140.76
  Bottom Layer w0.3: v1(57.404,139.192) 58.046,139.834 v1(78.613,139.834)
L1: JP9.1 JP9.2 R55.1 R56.1 R57.1 R58.1 R67.1 R68.1 R69.1 R70.1 R79.1 R80.1 R81.1 R82.1 R91.1 R92.1 R93.1 R94.1
N: JP9.3 U8.3 U9.3 U10.3 U11.3 U12.3 U13.3 U14.3 U15.3 U16.3 U17.3 U18.3 U19.3 U20.3 U21.3 U22.3 U23.3
NetC2_1: C2.1 C3.1 C4.1 D1.2 pad.11 pad.12 pad.13 U1.1
NetC10_1: C10.1 C11.1 C12.1 C13.1 L1.2 pad.21 pad.22 pad.23 U2.1
NetC24_1: C24.1 C25.1 C26.1 C27.1 L2.2 pad.14 pad.15 pad.16 U4.1
NetC34_2: C34.2 R7.2 U3.5 Y1.2 | length 21.4
  Top Layer w0.3: U3.5@91.529,141.76 91.554,141.735 100.584,141.735 101.092,142.243 101.092,143.256 101.473,143.637 102.87,143.637 103.251,143.256 103.251,142.494 ; Y1.2@103.251,140.97 103.251,142.494 ; C34.2@107.188,142.832 106.764,143.256 104.013,143.256 103.251,142.494
  Bottom Layer w0.3: Y1.2@103.251,140.97 R7.2@103.251,142.41
NetC35_2: C35.2 R6.1 R7.1 Y1.1 | length 11.8
  Top Layer w0.3: R6.1@99.568,144.864 100.033,144.399 102.616,144.399 103.251,145.034 Y1.1@103.251,146.05 103.251,145.288 104.14,144.399 106.891,144.399 C35.2@107.188,144.696
  Bottom Layer w0.3: R7.1@103.251,144.61 Y1.1@103.251,146.05
NetC60_2: C60.2 R37.1 R42.1 R43.2 | length 9.3
  Top Layer w1: R37.1@131.656,166.116 132.199,166.116 132.312,166.229 132.574,166.229 133.477,167.132 133.477,169.969 R43.2@133.604,170.096 C60.2@131.572,170.096 131.656,170.012 R42.1@131.656,168.148
NetC61_2: C61.2 R42.2 U7.2 | length 5.8
  Top Layer w0.7: U7.2@125.767,168.486 128.567,168.486 129.118,168.486 R42.2@129.456,168.148 129.456,170.012 C61.2@129.54,170.096
NetD4_1: D4.1 R2.2 | length 1.7
  Bottom Layer w1: R2.2@33.231,137.541 D4.1@34.925,137.541
NetD8_1: D8.1 R55.2 | length 1.7
  Bottom Layer w1: R55.2@229.616,138.768 229.616,140.081 D8.1@229.87,140.335
NetD9_1: D9.1 R56.2 | length 1.7
  Bottom Layer w1: R56.2@223.52,138.768 223.52,140.081 D9.1@223.774,140.335
NetD10_1: D10.1 R57.2 | length 1.7
  Bottom Layer w1: R57.2@217.424,138.768 217.424,140.081 D10.1@217.678,140.335
NetD11_1: D11.1 R58.2 | length 1.7
  Bottom Layer w1: R58.2@211.328,138.768 211.328,140.081 D11.1@211.582,140.335
NetD12_1: D12.1 R67.2 | length 1.7
  Bottom Layer w1: R67.2@205.232,138.768 205.232,140.081 D12.1@205.486,140.335
NetD13_1: D13.1 R68.2 | length 1.7
  Bottom Layer w1: R68.2@199.136,138.768 199.136,140.081 D13.1@199.39,140.335
NetD14_1: D14.1 R69.2 | length 1.7
  Bottom Layer w1: R69.2@193.04,138.768 193.04,140.081 D14.1@193.294,140.335
NetD15_1: D15.1 R70.2 | length 1.7
  Bottom Layer w1: R70.2@186.944,138.768 187.198,139.022 D15.1@187.198,140.335
NetD16_1: D16.1 R79.2 | length 1.3
  Bottom Layer w1: R79.2@180.848,138.768 D16.1@180.848,140.081
NetD17_1: D17.1 R80.2 | length 1.7
  Bottom Layer w1: R80.2@174.752,138.768 174.752,140.081 D17.1@175.006,140.335
NetD18_1: D18.1 R81.2 | length 1.7
  Bottom Layer w1: R81.2@168.656,138.768 168.656,140.081 D18.1@168.91,140.335
NetD19_1: D19.1 R82.2 | length 1.7
  Bottom Layer w1: R82.2@162.56,138.768 162.56,140.081 D19.1@162.814,140.335
NetD20_1: D20.1 R91.2 | length 1.7
  Bottom Layer w1: R91.2@156.464,138.768 156.464,140.081 D20.1@156.718,140.335
NetD21_1: D21.1 R92.2 | length 1.7
  Bottom Layer w1: R92.2@150.368,138.768 150.368,140.081 D21.1@150.622,140.335
NetD22_1: D22.1 R93.2 | length 1.7
  Bottom Layer w1: R93.2@144.272,138.768 144.272,140.081 D22.1@144.526,140.335
NetD23_1: D23.1 R94.2 | length 1.7
  Bottom Layer w1: R94.2@138.176,138.768 138.43,139.022 D23.1@138.43,140.335
NetP1_15: P1.15 R11.1 | length 3.1
  Top Layer w0.3: R11.1@47.16,134.112 47.16,131.148 P1.15@47.244,131.064
NetQ1_1: Q1.1 U8.2 | length 3.4
  Top Layer w0.3: U8.2@229.87,152.781 232.155,155.066 Q1.1@232.155,155.19
NetQ1_2: Q1.2 R63.2 | length 2.1
  Top Layer w0.3: R63.2@228.219,155.11 230.17,155.11 Q1.2@230.25,155.19
NetQ2_1: Q2.1 U9.2 | length 3.4
  Top Layer w0.3: U9.2@223.774,152.781 226.059,155.066 Q2.1@226.059,155.19
NetQ2_2: Q2.2 R64.2 | length 2.1
  Top Layer w0.3: R64.2@222.123,155.11 224.074,155.11 Q2.2@224.154,155.19
NetQ3_1: Q3.1 U10.2 | length 3.4
  Top Layer w0.3: U10.2@217.678,152.781 217.678,152.905 Q3.1@219.963,155.19
NetQ3_2: Q3.2 R65.2 | length 2.1
  Top Layer w0.3: R65.2@216.027,155.11 217.978,155.11 Q3.2@218.058,155.19
NetQ4_1: Q4.1 U11.2 | length 3.4
  Top Layer w0.3: U11.2@211.582,152.781 213.867,155.066 Q4.1@213.867,155.19
NetQ4_2: Q4.2 R66.2 | length 2.1
  Top Layer w0.3: R66.2@209.931,155.11 211.882,155.11 Q4.2@211.962,155.19
NetQ5_1: Q5.1 U12.2 | length 3.4
  Top Layer w0.3: U12.2@205.486,152.781 205.486,152.905 Q5.1@207.771,155.19
NetQ5_2: Q5.2 R75.2 | length 2.1
  Top Layer w0.3: R75.2@203.835,155.11 205.786,155.11 Q5.2@205.866,155.19
NetQ6_1: Q6.1 U13.2 | length 3.4
  Top Layer w0.3: U13.2@199.39,152.781 201.675,155.066 Q6.1@201.675,155.19
NetQ6_2: Q6.2 R76.2 | length 2.1
  Top Layer w0.3: R76.2@197.739,155.11 199.69,155.11 Q6.2@199.77,155.19
NetQ7_1: Q7.1 U14.2 | length 3.4
  Top Layer w0.3: U14.2@193.294,152.781 195.579,155.066 Q7.1@195.579,155.19
NetQ7_2: Q7.2 R77.2 | length 3
  Top Layer w0.3: R77.2@191.643,157.31 193.674,155.279 Q7.2@193.674,155.19
NetQ8_1: Q8.1 U15.2 | length 3.4
  Top Layer w0.3: U15.2@187.198,152.781 187.198,152.905 Q8.1@189.483,155.19
NetQ8_2: Q8.2 R78.2 | length 3
  Top Layer w0.3: R78.2@185.547,157.31 187.578,155.279 Q8.2@187.578,155.19
NetQ9_1: Q9.1 U16.2 | length 3.4
  Top Layer w0.3: U16.2@181.102,152.781 183.387,155.066 Q9.1@183.387,155.19
NetQ9_2: Q9.2 R87.2 | length 3
  Top Layer w0.3: R87.2@179.451,157.31 181.482,155.279 Q9.2@181.482,155.19
NetQ10_1: Q10.1 U17.2 | length 3.4
  Top Layer w0.3: U17.2@175.006,152.781 175.006,152.905 Q10.1@177.291,155.19
NetQ10_2: Q10.2 R88.2 | length 2.9
  Top Layer w0.3: R88.2@173.228,157.056 173.52,157.056 Q10.2@175.386,155.19
NetQ11_1: Q11.1 U18.2 | length 3.4
  Top Layer w0.3: U18.2@168.91,152.781 171.195,155.066 Q11.1@171.195,155.19
NetQ11_2: Q11.2 R89.2 | length 3
  Top Layer w0.3: R89.2@167.259,157.31 169.29,155.279 Q11.2@169.29,155.19
NetQ12_1: Q12.1 U19.2 | length 3.4
  Top Layer w0.3: U19.2@162.814,152.781 165.099,155.066 Q12.1@165.099,155.19
NetQ12_2: Q12.2 R90.2 | length 3.3
  Top Layer w0.3: R90.2@161.036,157.564 163.194,155.406 Q12.2@163.194,155.19
NetQ13_1: Q13.1 U20.2 | length 3.4
  Top Layer w0.3: U20.2@156.718,152.781 159.003,155.066 Q13.1@159.003,155.19
NetQ13_2: Q13.2 R99.2 | length 3
  Top Layer w0.3: R99.2@155.067,157.31 157.098,155.279 Q13.2@157.098,155.19
NetQ14_1: Q14.1 U21.2 | length 3.4
  Top Layer w0.3: U21.2@150.622,152.781 152.907,155.066 Q14.1@152.907,155.19